# Altium PCB AgulhasCPU25.PCBDOC (part 6 of 10)
Units mm, origin at the board's own origin, x right, y up, seen from the top; angles counter-clockwise.
Board outline 179.96 x 114.94 mm, 2 copper layers (Top Layer, Top, Bottom Layer, Bottom), stack 1.341 mm thick; 247 components, 222 nets, 910 pads, 491 vias.
Unrouted connection lines stored in the file: 2.
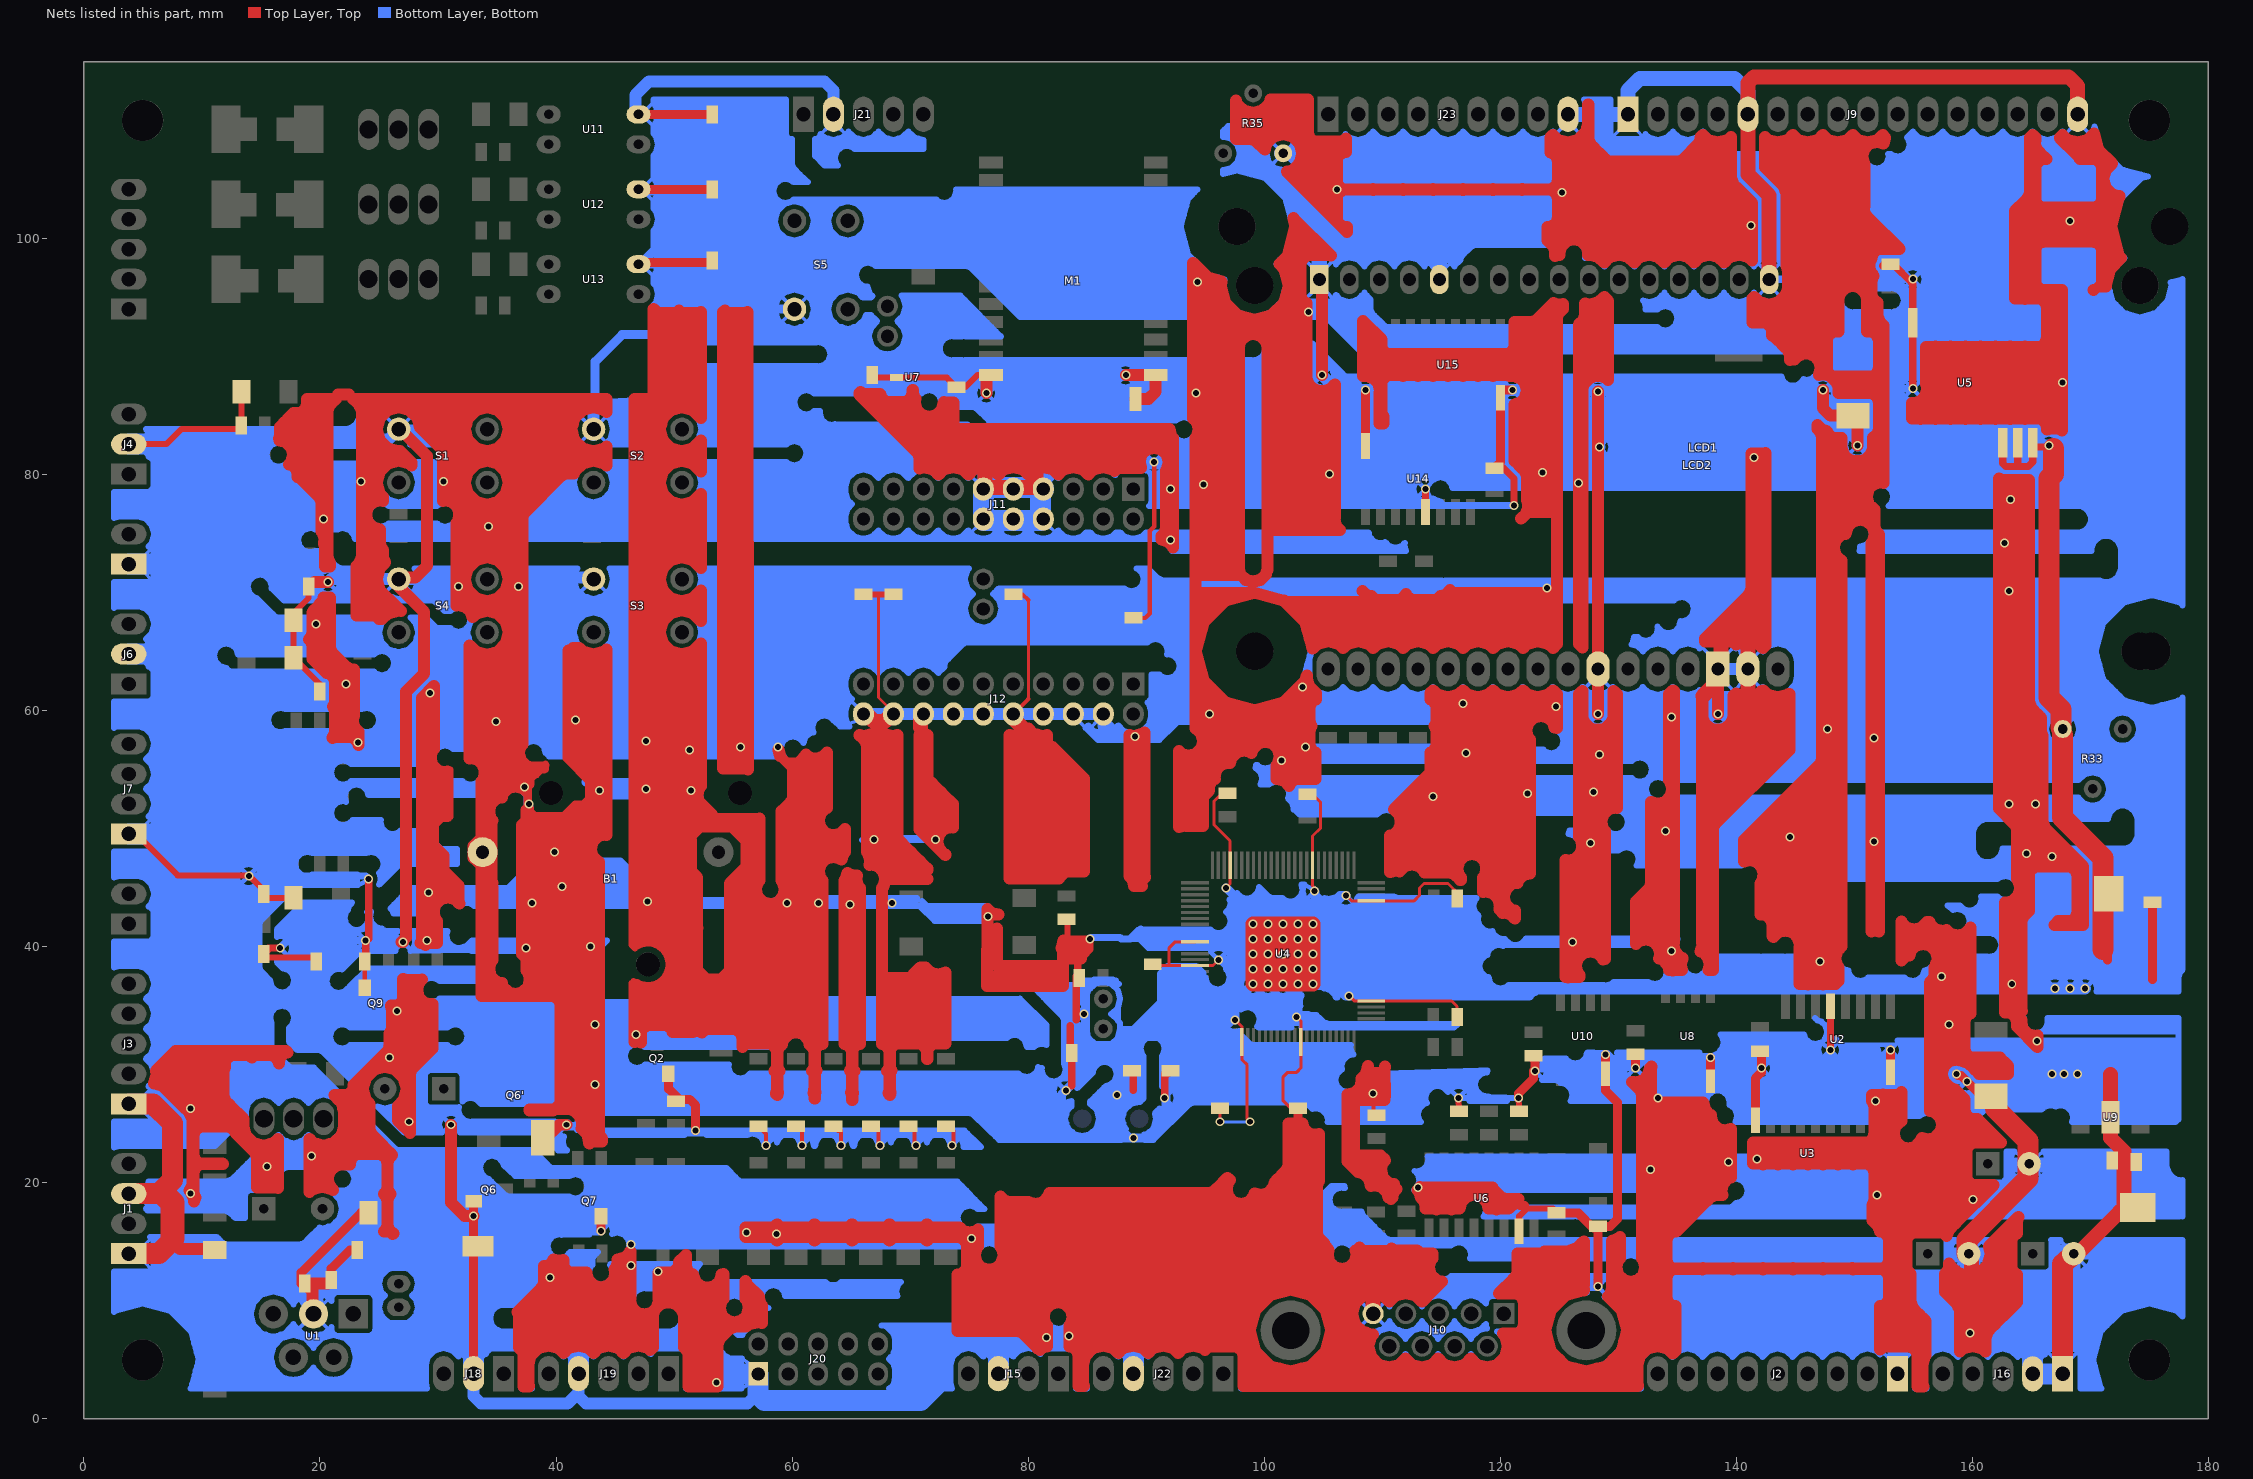
[diagram p6: the nets of this part, all layers, seen from the top]

## Via types
v1: diameter 0.762, hole 0.508, Top Layer, Top to Bottom Layer, Bottom, 489 vias
v2: diameter 0.864, hole 0.813, Top Layer, Top to Bottom Layer, Bottom, 2 vias

## Nets (pads, with @x,y where several pads share a name; then routed paths per layer and width w, separated by ;. In a path a pad name is that pad's centre, name@x,y a point inside that pad or via, vN(x,y) a via of type N, cw(c..) or ccw(c..) an arc to the next point about the centre after c; other vN are vias at no path point) (continued)
GND: (continued)
  Bottom Layer, Bottom w0.508: 2.54,9.398 3.708,9.398 ; 2.54,9.779 14.376,9.779 ; 2.54,10.16 14.707,10.16 ; 2.54,10.541 15.138,10.541 ; 2.54,10.922 25.146,10.922 ; 2.54,11.303 25.044,11.303 ; 2.54,11.684 25.07,11.684 ; 2.54,12.065 25.171,12.065 ; 2.54,12.446 25.527,12.446 ; 2.54,23.114 11.151,23.114 ; 2.54,23.495 11.532,23.495 ; 2.54,23.876 11.913,23.876 ; 2.54,24.257 12.294,24.257 ; 2.54,24.638 12.675,24.638 ; 2.54,25.019 13.056,25.019 ; 2.54,38.354 14.884,38.354 ; 2.54,38.735 14.884,38.735 ; 2.54,39.116 14.884,39.116 ; 2.54,39.497 14.884,39.497 ; 2.54,39.878 14.884,39.878 ; 2.54,40.259 14.884,40.259 ; 2.54,45.974 12.929,45.974 ; 2.54,46.355 13.03,46.355 ; 2.54,46.736 13.31,46.736 ; 2.54,47.117 17.907,47.117 ; 2.54,47.498 18.009,47.498 ; 2.54,47.879 18.39,47.879 ; 2.54,58.547 2.616,58.547 ; 2.54,58.928 15.672,58.928 ; 2.54,59.309 15.621,59.309 ; 2.54,59.69 15.723,59.69 ; 2.54,60.071 16.104,60.071 ; 2.54,60.452 64.643,60.452 ; 2.54,68.834 15.316,68.834 ; 2.54,69.215 14.935,69.215 ; 2.54,69.596 14.376,69.596 ; 2.54,69.977 13.995,69.977 ; 2.54,70.358 13.894,70.358 ; 2.54,70.739 13.945,70.739 ; 2.54,76.454 24.13,76.454 ; 2.54,76.835 24.181,76.835 ; 2.54,77.216 24.359,77.216 ; 2.54,77.597 25.095,77.597 ; 2.54,77.978 25.705,77.978 ; 2.54,78.359 25.324,78.359 ; 4.978,58.547 15.85,58.547 ; 5.385,30.353 16.84,30.353 ; 5.385,35.687 28.677,35.687 ; 5.385,37.973 14.961,37.973 ; 5.385,45.593 13.03,45.593 ; 5.385,53.213 22.2,53.213 ; 5.385,66.167 25.121,66.167 ; 5.385,68.453 15.697,68.453 ; 5.385,76.073 24.232,76.073 ; 5.385,83.693 25.044,83.693 ; 5.512,20.066 15.799,20.066 ; 5.512,30.734 16.459,30.734 ; 5.512,35.306 29.413,35.306 ; 5.512,53.594 22.581,53.594 ; 5.512,58.166 16.586,58.166 ; 5.512,65.786 25.222,65.786 ; 5.639,18.161 13.64,18.161 ; 5.639,28.067 21.158,28.067 ; 5.639,32.639 15.9,32.639 ; 5.639,33.401 15.9,33.401 ; 5.639,43.307 16.078,43.307 ; 5.639,50.927 21.031,50.927 ; 5.639,55.499 21.311,55.499 ; 5.639,56.261 29.642,56.261 ; 5.639,60.833 64.948,60.833 ; 5.639,63.881 11.405,63.881 ; 5.639,73.787 18.39,73.787 ; 5.639,81.407 15.545,81.407 ; 5.766,25.4 13.437,25.4 ; 5.766,28.448 20.777,28.448 ; 5.766,29.972 17.221,29.972 ; 5.766,36.068 21.539,36.068 ; 5.766,37.592 15.316,37.592 ; 5.766,40.64 14.884,40.64 ; 5.766,43.688 16.459,43.688 ; 5.766,45.212 13.31,45.212 ; 5.766,48.26 28.016,48.26 ; 5.766,51.308 20.93,51.308 ; 5.766,52.832 22.098,52.832 ; 5.766,63.5 12.141,63.5 ; 5.766,66.548 25.019,66.548 ; 5.766,68.072 16.078,68.072 ; 5.766,71.12 14.122,71.12 ; 5.766,74.168 18.212,74.168 ; 5.766,75.692 24.613,75.692 ; 5.766,78.74 25.146,78.74 ; 5.766,81.788 15.494,81.788 ; 5.766,83.312 25.146,83.312 ; 5.791,19.685 15.418,19.685 ; 5.791,31.115 16.078,31.115 ; 5.791,34.925 16.586,34.925 ; 5.791,53.975 21.311,53.975 ; 5.791,57.785 60.02,57.785 ; 5.791,65.405 11.405,65.405 ; 5.817,18.542 13.64,18.542 ; 5.817,32.258 15.9,32.258 ; 5.817,33.782 15.824,33.782 ; 5.817,55.118 21.031,55.118 ; 5.817,56.642 29.82,56.642 ; 5.817,64.262 11.125,64.262 ; 5.867,12.827 42.901,12.827 ; 5.867,15.113 11.532,15.113 ; 5.867,28.829 20.396,28.829 ; 5.867,29.591 19.634,29.591 ; 5.867,36.449 16.078,36.449 ; 5.867,37.211 15.697,37.211 ; 5.867,44.069 16.84,44.069 ; 5.867,44.831 17.602,44.831 ; 5.867,51.689 21.031,51.689 ; 5.867,52.451 22.149,52.451 ; 5.867,66.929 25.095,66.929 ; 5.867,67.691 25.476,67.691 ; 5.867,74.549 18.161,74.549 ; 5.867,75.311 18.644,75.311 ; 5.867,82.169 15.596,82.169 ; 5.867,82.931 25.273,82.931 ; 5.893,19.304 13.919,19.304 ; 5.893,27.686 21.539,27.686 ; 5.893,31.496 15.9,31.496 ; 5.893,34.544 15.977,34.544 ; 5.893,42.926 15.697,42.926 ; 5.893,50.546 21.311,50.546 ; 5.893,54.356 21.031,54.356 ; 5.893,57.404 38.049,57.404 ; 5.893,61.214 64.821,61.214 ; 5.893,65.024 11.125,65.024 ; 5.893,73.406 19.126,73.406 ; 5.893,81.026 15.723,81.026 ; 5.918,13.208 43.078,13.208 ; 5.918,13.589 40.259,13.589 ; 5.918,13.97 39.522,13.97 ; 5.918,14.351 39.345,14.351 ; 5.918,14.732 39.294,14.732 ; 5.918,18.923 13.64,18.923 ; 5.918,25.781 13.741,25.781 ; 5.918,26.162 13.741,26.162 ; 5.918,26.543 13.843,26.543 ; 5.918,26.924 14.122,26.924 ; 5.918,27.305 14.656,27.305 ; 5.918,31.877 15.9,31.877 ; 5.918,34.163 15.824,34.163 ; 5.918,41.021 14.884,41.021 ; 5.918,41.402 14.884,41.402 ; 5.918,41.783 14.884,41.783 ; 5.918,42.164 14.961,42.164 ; 5.918,42.545 15.316,42.545 ; 5.918,48.641 28.397,48.641 ; 5.918,49.022 28.778,49.022 ; 5.918,49.403 29.185,49.403 ; 5.918,49.784 25.502,49.784 ; 5.918,50.165 25.222,50.165 ; 5.918,54.737 20.93,54.737 ; 5.918,57.023 30.556,57.023 ; 5.918,61.595 64.618,61.595 ; 5.918,61.976 64.541,61.976 ; 5.918,62.357 64.541,62.357 ; 5.918,62.738 64.592,62.738 ; 5.918,63.119 24.74,63.119 ; 5.918,64.643 11.024,64.643 ; 5.918,71.501 14.859,71.501 ; 5.918,71.882 20.65,71.882 ; 5.918,72.263 21.336,72.263 ; 5.918,72.644 21.006,72.644 ; 5.918,73.025 20.853,73.025 ; 5.918,79.121 25.044,79.121 ; 5.918,79.502 25.044,79.502 ; 5.918,79.883 25.146,79.883 ; 5.918,80.264 25.349,80.264 ; 5.918,80.645 16.459,80.645 ; 6.223,9.398 14.275,9.398 ; 7.417,9.017 14.173,9.017 ; 7.798,8.636 14.173,8.636 ; 8.179,8.255 14.275,8.255 ; 8.56,7.874 14.402,7.874 ; 8.941,7.493 14.783,7.493 ; 9.093,2.591 9.728,4.978 9.093,7.341 7.341,9.093 4.978,9.728 2.591,9.093 2.54,9.017 2.54,12.471 5.385,12.471 5.613,12.522 5.842,12.751 5.918,12.979 5.918,14.935 5.842,15.164 5.613,15.392 11.252,15.392 11.405,15.24 11.735,14.91 12.014,14.783 12.141,14.757 18.288,14.757 18.415,14.783 18.694,14.91 19.025,15.24 19.964,16.18 20.218,16.104 21.031,16.332 21.641,16.942 21.869,17.78 ; 9.144,7.112 15.418,7.112 ; 9.169,2.921 28.981,2.921 ; 9.246,6.731 16.662,6.731 ; 9.271,3.302 17.602,3.302 ; 9.347,6.35 16.281,6.35 ; 9.373,3.683 16.612,3.683 ; 9.449,5.969 16.027,5.969 ; 9.474,4.064 16.231,4.064 ; 9.55,5.588 15.926,5.588 ; 9.576,4.445 16.027,4.445 ; 9.652,5.207 15.824,5.207 ; 9.677,4.826 15.926,4.826 ; 12.421,17.399 13.64,17.399 ; 12.7,65.405 25.578,65.405 ; 12.725,20.447 16.18,20.447 ; 12.802,17.018 13.64,17.018 ; 12.979,65.024 25.222,65.024 ; 13.106,20.828 16.561,20.828 ; 13.487,21.209 17.018,21.209 ; 13.64,17.78 5.258,17.78 ; 13.868,21.59 33.655,21.59 ; 14.249,21.971 33.884,21.971 ; 14.605,45.212 23.216,45.212 ; 14.605,46.736 17.958,46.736 ; 14.63,22.352 38.43,22.352 ; 14.884,45.593 23.114,45.593 ; 14.884,46.355 18.136,46.355 ; 14.935,71.501 19.914,71.501 ; 15.011,22.733 38.049,22.733 ; 15.392,23.114 26.111,23.114 ; 15.672,71.12 19.736,71.12 ; 15.799,23.495 17.196,23.495 ; 15.799,27.305 17.196,27.305 ; 15.85,36.83 5.969,36.83 ; 15.85,70.739 19.685,70.739 ; 15.9,33.02 5.258,33.02 ; 15.9,70.358 19.787,70.358 ; 15.977,82.55 5.969,82.55 ; 16.281,69.977 20.168,69.977 ; 16.332,23.876 16.662,23.876 ; 16.332,26.924 16.662,26.924 ; 16.358,38.735 22.555,38.735 ; 16.358,41.021 22.962,41.021 ; 16.358,41.402 23.063,41.402 ; 16.535,80.645 25.73,80.645 ; 16.662,7.112 18.821,7.112 ; 16.662,38.354 22.174,38.354 ; 16.662,41.783 22.327,41.783 ; 16.662,58.166 23.952,58.166 ; 16.662,69.596 26.162,69.596 ; 16.942,10.541 18.542,10.541 ; 17.018,34.925 40.894,34.925 52.705,34.925 79.959,34.925 ; 17.018,82.55 25.654,82.55 ; 17.043,42.164 22.149,42.164 ; 17.221,44.45 5.969,44.45 ; 17.272,39.116 22.936,39.116 ; 17.272,40.64 22.86,40.64 ; 17.297,7.493 18.186,7.493 ; 17.374,10.16 18.11,10.16 ; 17.374,32.258 20.879,32.258 ; 17.374,32.639 20.93,32.639 ; 17.374,33.02 21.107,33.02 ; 17.374,37.973 21.057,37.973 ; 17.424,31.877 20.98,31.877 ; 17.424,42.545 22.098,42.545 ; 17.526,36.449 20.803,36.449 ; 17.551,39.497 23.343,39.497 ; 17.551,40.259 22.911,40.259 ; 17.628,34.544 80.34,34.544 ; 17.653,33.401 21.844,33.401 ; 17.678,7.874 17.805,7.874 ; 17.704,9.779 17.78,9.779 ; 17.704,37.592 20.676,37.592 ; 17.755,36.83 20.625,36.83 ; 17.78,33.782 81.102,33.782 ; 17.78,34.163 80.721,34.163 ; 17.805,31.496 21.361,31.496 ; 17.805,37.211 20.574,37.211 ; 17.805,42.926 22.2,42.926 ; 17.882,3.302 21.006,3.302 ; 18.186,43.307 22.403,43.307 ; 18.263,74.93 5.969,74.93 ; 18.339,23.495 19.736,23.495 ; 18.339,27.305 19.736,27.305 ; 18.567,43.688 22.682,43.688 ; 18.821,6.731 20.066,6.731 ; 18.872,3.683 20.015,3.683 ; 18.872,23.876 19.202,23.876 ; 18.872,26.924 19.202,26.924 ; 18.872,45.974 14.986,45.974 ; 18.898,15.113 39.395,15.113 ; 18.948,45.974 23.165,45.974 ; 19.202,6.35 19.685,6.35 ; 19.202,73.406 20.853,73.406 ; 19.253,4.064 19.634,4.064 ; 19.279,15.494 39.776,15.494 ; 19.66,15.875 42.774,15.875 ; 20.015,29.21 5.969,29.21 ; 20.066,7.112 21.234,7.112 ; 20.193,31.115 45.923,31.115 ; 20.345,10.541 21.158,10.541 ; 20.549,37.084 20.701,37.592 21.057,37.948 21.59,38.1 21.869,38.024 23.114,39.268 23.317,39.472 23.546,39.573 23.343,39.624 22.987,39.98 22.835,40.513 22.987,41.021 23.343,41.377 23.876,41.529 24.384,41.377 24.74,41.021 24.892,40.513 24.74,39.98 24.384,39.624 24.282,39.599 26.416,39.599 26.162,39.853 26.01,40.386 26.162,40.894 26.518,41.25 26.619,41.3 25.629,41.3 25.349,41.402 25.248,41.504 24.74,41.656 24.384,42.012 24.232,42.545 ; 20.599,30.734 45.822,30.734 ; 20.701,7.493 20.98,7.493 ; 20.701,16.256 32.487,16.256 ; 20.701,19.304 21.844,19.304 ; 20.701,36.551 21.057,36.195 21.59,36.043 22.098,36.195 22.327,36.424 22.377,36.449 22.581,36.652 24.054,38.125 34.519,38.125 34.519,38.1 34.671,37.567 35.027,37.211 ; 20.726,71.882 25.197,71.882 ; 20.777,10.16 20.98,10.16 ; 20.879,23.495 25.73,23.495 ; 20.879,27.305 21.92,27.305 ; 20.98,30.353 45.923,30.353 ; 21.285,3.302 28.981,3.302 ; 21.311,52.07 5.969,52.07 ; 21.336,16.637 32.106,16.637 ; 21.336,18.923 35.738,18.923 ; 21.361,29.972 46.203,29.972 ; 21.412,23.876 25.349,23.876 ; 21.412,26.924 22.301,26.924 ; 21.463,71.501 25.095,71.501 ; 21.59,70.358 25.197,70.358 ; 21.615,36.068 28.499,36.068 ; 21.641,71.12 24.994,71.12 ; 21.666,17.018 32.004,17.018 ; 21.666,18.542 75.514,18.542 ; 21.692,24.257 24.968,24.257 ; 21.692,26.543 22.682,26.543 ; 21.692,70.739 25.095,70.739 ; 21.742,29.591 25.476,29.591 ; 21.768,17.399 32.055,17.399 ; 21.768,18.161 32.969,18.161 ; 21.793,24.638 24.587,24.638 ; 21.793,26.162 23.063,26.162 ; 21.819,25.019 24.206,25.019 ; 21.819,25.4 23.825,25.4 ; 21.819,25.781 23.444,25.781 ; 21.92,19.304 35.306,19.304 ; 21.92,33.401 31.445,33.401 ; 22.123,29.21 24.486,29.21 ; 22.225,6.731 52.934,6.731 ; 22.276,3.683 28.981,3.683 ; 22.352,36.449 28.448,36.449 ; 22.403,21.209 33.579,21.209 ; 22.479,75.311 64.694,75.311 ; 22.504,28.829 24.105,28.829 ; 22.606,6.35 53.315,6.35 ; 22.606,50.546 25.121,50.546 ; 22.606,53.975 32.106,53.975 ; 22.606,55.499 29.693,55.499 ; 22.657,4.064 28.981,4.064 ; 22.657,19.685 34.925,19.685 ; 22.758,36.83 28.55,36.83 ; 22.784,20.828 33.68,20.828 ; 22.835,84.074 25.07,84.074 ; 22.86,4.445 28.981,4.445 ; 22.86,5.969 30.455,5.969 ; 22.86,20.066 34.544,20.066 ; 22.86,74.93 65.075,74.93 ; 22.885,28.448 23.978,28.448 ; 22.962,4.826 29.032,4.826 ; 22.962,5.588 29.515,5.588 ; 22.962,74.549 66.015,74.549 ; 23.063,5.207 29.134,5.207 ; 23.089,39.878 17.653,39.878 ; 23.139,37.211 28.931,37.211 ; 23.139,41.402 23.343,41.402 ; 23.165,84.455 25.171,84.455 ; 23.266,28.067 23.876,28.067 ; 23.317,84.836 25.4,84.836 ; 23.52,37.592 34.646,37.592 ; 23.622,53.594 v1@37.592,53.594 ; 23.647,27.686 23.901,27.686 ; 23.876,41.783 24.613,41.783 ; 23.901,37.973 34.544,37.973 ; 24.003,53.213 36.043,53.213 ; 24.028,42.926 24.333,42.926 ; 24.028,58.166 61.798,58.166 ; 24.054,42.164 24.333,42.164 ; 24.105,42.545 24.232,42.545 ; 24.105,52.832 34.366,52.832 ; 24.384,41.402 25.375,41.402 ; 24.409,7.112 52.553,7.112 ; 24.486,10.541 25.4,10.541 ; 24.511,60.071 64.541,60.071 ; 24.638,39.878 26.137,39.878 ; 24.663,7.493 35.077,7.493 ; 24.689,7.874 34.595,7.874 ; 24.689,8.255 25.679,8.255 ; 24.689,8.636 25.298,8.636 ; 24.689,9.017 25.121,9.017 ; 24.689,9.398 25.019,9.398 ; 24.689,9.779 25.095,9.779 ; 24.689,10.16 25.248,10.16 ; 24.765,41.021 26.264,41.021 ; 24.765,58.547 61.697,58.547 ; 24.816,40.259 26.035,40.259 ; 24.867,40.64 26.086,40.64 ; 24.892,47.879 27.635,47.879 ; 24.892,59.69 64.541,59.69 ; 24.943,58.928 61.798,58.928 ; 24.994,59.309 62.078,59.309 ; 25.07,45.974 25.73,45.974 ; 25.121,45.593 25.349,45.593 ; 25.146,46.355 26.111,46.355 ; 25.171,26.162 31.725,26.162 ; 25.171,77.597 30.556,77.597 ; 25.197,67.31 5.969,67.31 ; 25.273,47.498 27.254,47.498 ; 25.298,65.024 26.34,65.024 ; 25.324,46.736 26.492,46.736 ; 25.375,47.117 26.873,47.117 ; 25.527,69.977 21.209,69.977 ; 25.552,25.781 30.582,25.781 ; 25.933,25.4 30.201,25.4 ; 26.035,64.643 73.482,64.643 ; 26.06,43.155 29.896,43.155 ; 26.162,63.5 65.075,63.5 ; 26.213,64.262 73.101,64.262 ; 26.264,63.881 66.015,63.881 ; 26.289,43.536 30.048,43.536 ; 26.314,25.019 30.099,25.019 ; 26.365,26.543 29.032,26.543 ; 26.416,81.026 59.538,81.026 ; 26.492,29.21 28.931,29.21 ; 26.67,43.917 30.709,43.917 ; 26.695,24.638 30.15,24.638 ; 26.746,26.924 28.88,26.924 ; 26.797,49.784 28.829,49.784 ; 26.822,49.809 26.67,49.657 26.162,49.505 25.629,49.657 25.273,50.013 25.121,50.546 ; 26.873,28.829 28.88,28.829 ; 26.975,27.305 28.88,27.305 ; 26.975,65.024 33.833,65.024 ; 27,28.448 28.88,28.448 ; 27.051,44.298 45.695,44.298 ; 27.076,24.257 30.328,24.257 ; 27.076,27.686 28.88,27.686 ; 27.102,28.067 28.88,28.067 ; 27.153,69.596 33.655,69.596 ; 27.432,44.679 45.11,44.679 ; 27.584,80.645 33.223,80.645 ; 27.61,77.978 33.198,77.978 ; 27.635,8.255 34.442,8.255 ; 27.661,82.55 33.147,82.55 ; 27.686,85.217 33.274,85.217 ; 27.711,41.123 30.759,41.123 ; 27.737,65.405 33.071,65.405 ; 27.788,12.446 42.799,12.446 ; 27.788,69.977 33.02,69.977 ; 27.838,67.691 29.159,67.691 ; 27.915,10.541 46.584,10.541 ; 27.915,84.836 32.893,84.836 ; 27.965,39.98 31.318,39.98 ; 27.965,40.742 30.759,40.742 ; 27.965,80.264 32.842,80.264 ; 27.991,78.359 32.817,78.359 ; 28.016,8.636 34.442,8.636 ; 28.042,82.931 32.766,82.931 ; 28.067,10.16 46.482,10.16 ; 28.067,40.361 30.861,40.361 ; 28.092,65.786 32.715,65.786 ; 28.118,67.31 29.54,67.31 ; 28.118,70.358 32.69,70.358 ; 28.118,71.882 32.69,71.882 ; 28.143,12.065 42.85,12.065 ; 28.143,84.455 32.664,84.455 ; 28.169,10.922 46.965,10.922 ; 28.169,78.74 32.639,78.74 ; 28.169,79.883 32.639,79.883 ; 28.169,83.312 32.639,83.312 ; 28.194,9.017 34.544,9.017 ; 28.194,66.167 32.614,66.167 ; 28.219,9.779 46.507,9.779 ; 28.219,66.929 31.09,66.929 ; 28.219,70.739 32.588,70.739 ; 28.219,71.501 32.588,71.501 ; 28.245,11.684 43.078,11.684 ; 28.245,84.074 32.563,84.074 ; 28.27,11.303 52.781,11.303 ; 28.27,79.121 32.537,79.121 ; 28.27,79.502 32.537,79.502 ; 28.27,83.693 32.537,83.693 ; 28.296,9.398 34.849,9.398 ; 28.296,66.548 32.512,66.548 ; 29.489,35.306 79.578,35.306 ; 29.566,49.505 29.439,49.505 29.159,49.378 28.956,49.174 25.019,45.237 25.146,45.72 25.019,46.203 25.248,46.457 25.4,46.99 25.248,47.498 24.892,47.854 24.384,48.006 23.952,47.904 19.329,47.904 18.923,48.006 18.39,47.854 18.034,47.498 17.882,46.99 18.034,46.457 18.39,46.101 18.923,45.949 19.329,46.076 23.19,46.076 23.089,45.72 23.241,45.187 18.136,45.187 17.856,45.06 17.653,44.856 15.189,42.393 14.986,42.189 14.884,41.91 14.884,41.631 14.884,38.481 14.884,38.202 14.986,37.922 15.189,37.719 15.773,37.135 15.926,36.601 16.281,36.246 16.815,36.093 17.323,36.246 17.678,36.601 17.831,37.135 17.678,37.643 17.323,37.998 16.866,38.125 16.358,38.659 16.358,38.913 16.637,38.837 17.145,38.989 17.501,39.345 17.653,39.878 ; 29.591,55.88 5.258,55.88 ; 29.718,69.215 74.803,69.215 ; 29.972,37.211 35.027,37.211 ; 30.124,68.834 74.701,68.834 ; 30.505,68.453 31.09,68.453 ; 30.632,57.023 37.313,57.023 ; 30.632,77.597 64.948,77.597 ; 30.988,43.917 57.734,43.917 ; 31.369,77.216 64.821,77.216 ; 31.42,5.588 32.055,5.588 ; 31.496,76.073 64.541,76.073 ; 31.521,33.401 81.483,33.401 ; 31.547,76.835 64.618,76.835 ; 31.598,76.454 64.541,76.454 ; 31.623,25.781 31.826,25.781 ; 31.877,24.257 40.107,24.257 ; 31.877,39.878 32.258,39.878 32.893,40.513 44.323,40.513 ; 32.004,25.4 32.106,25.4 ; 32.004,29.21 54.839,29.21 ; 32.055,24.638 39.929,24.638 ; 32.08,26.924 32.106,26.924 ; 32.08,27.305 82.271,27.305 ; 32.08,27.686 82.169,27.686 ; 32.08,28.067 82.22,28.067 ; 32.08,28.448 82.398,28.448 ; 32.08,28.829 55.575,28.829 ; 32.106,25.019 39.878,25.019 ; 32.233,17.78 21.869,17.78 ; 32.258,33.02 81.559,33.02 ; 32.258,40.005 31.75,39.853 31.217,40.005 30.861,40.361 ; 32.385,31.877 59.385,31.877 ; 32.385,66.929 32.588,66.929 ; 32.385,68.453 74.676,68.453 ; 32.436,32.639 81.559,32.639 ; 32.487,32.258 59.665,32.258 ; 32.664,67.31 32.69,67.31 ; 32.664,68.072 33.477,68.072 ; 32.842,39.599 43.409,39.599 44.323,40.513 ; 32.969,67.691 32.766,67.691 ; 32.995,5.969 30.48,5.969 ; 33.045,18.161 75.895,18.161 ; 33.401,26.924 82.652,26.924 ; 33.401,53.975 35.204,53.975 37.313,53.975 37.541,53.746 37.541,52.883 37.44,52.781 37.389,53.975 ; 33.68,54.356 35.89,54.356 ; 33.68,55.118 35.128,55.118 ; 33.782,17.78 74.397,17.78 ; 33.909,16.637 43.155,16.637 ; 33.96,5.588 34.112,5.588 ; 33.96,17.399 74.117,17.399 ; 33.985,20.447 22.885,20.447 ; 34.011,17.018 74.016,17.018 ; 34.468,65.024 42.951,65.024 ; 34.544,85.598 60.3,85.598 ; 34.646,69.596 42.672,69.596 ; 34.823,68.072 42.393,68.072 ; 35.027,85.217 42.291,85.217 ; 35.077,80.645 42.24,80.645 ; 35.103,77.978 42.215,77.978 ; 35.154,82.55 42.164,82.55 ; 35.23,65.405 42.113,65.405 ; 35.281,21.971 38.811,21.971 ; 35.281,69.977 42.037,69.977 ; 35.331,67.691 41.961,67.691 ; 35.408,84.836 41.91,84.836 ; 35.458,80.264 41.859,80.264 ; 35.484,78.359 41.834,78.359 ; 35.509,21.59 39.192,21.59 ; 35.509,54.737 33.782,54.737 ; 35.535,82.931 41.783,82.931 ; 35.585,65.786 41.732,65.786 ; 35.611,67.31 41.707,67.31 ; 35.611,70.358 41.707,70.358 ; 35.611,71.882 41.707,71.882 ; 35.636,84.455 41.681,84.455 ; 35.662,78.74 41.656,78.74 ; 35.662,79.883 41.656,79.883 ; 35.662,83.312 41.656,83.312 ; 35.687,56.642 37.135,56.642 ; 35.687,66.167 41.631,66.167 ; 35.712,66.929 41.58,66.929 ; 35.712,70.739 41.605,70.739 ; 35.712,71.501 41.605,71.501 ; 35.738,84.074 41.58,84.074 ; 35.763,79.121 41.554,79.121 ; 35.763,79.502 41.554,79.502 ; 35.763,83.693 41.554,83.693 ; 35.789,66.548 41.529,66.548 ; 35.865,21.209 54.432,21.209 ; 36.093,56.261 37.084,56.261 ; 36.246,20.828 54.813,20.828 ; 36.474,55.88 37.186,55.88 ; 36.855,55.499 37.567,55.499 ; 36.982,5.588 38.405,5.588 ; 37.059,2.921 37.871,2.921 ; 37.059,3.302 37.871,3.302 ; 37.059,3.683 37.871,3.683 ; 37.059,4.064 37.871,4.064 ; 37.059,4.445 37.871,4.445 ; 37.059,4.826 37.922,4.826 ; 37.059,5.207 38.024,5.207 ; 37.44,52.832 37.084,53.188 36.576,53.34 36.043,53.188 35.89,53.061 34.773,53.061 34.493,52.934 34.341,52.807 24.105,52.807 23.978,53.213 23.622,53.569 23.114,53.721 22.581,53.569 22.225,53.213 22.073,52.705 22.2,52.248 21.971,52.324 21.438,52.172 21.082,51.816 20.93,51.308 ; 37.719,54 36.424,54 36.144,54.102 35.941,54.305 34.976,55.27 33.63,55.27 33.63,55.245 33.782,54.737 ; 38.125,57.404 59.284,57.404 ; 38.862,57.023 v1@59.106,57.023 ; 39.014,23.876 40.64,23.876 ; 39.04,56.642 v1@59.055,56.642 ; 39.116,48.133 43.205,48.108 ; 39.167,47.422 39.243,47.498 ; 39.218,47.473 39.243,47.498 ; 39.243,47.752 43.18,47.752 43.155,48.26 43.205,48.412 39.37,48.387 ; 39.268,56.261 59.157,56.261 ; 39.345,5.969 33.02,5.969 ; 39.395,23.495 40.538,23.495 ; 39.497,47.752 39.37,47.752 ; 39.497,47.777 39.37,47.752 ; v1@39.751,47.727 39.751,47.752 39.37,47.752 ; 39.776,23.114 40.64,23.114 ; 40.157,22.733 40.919,22.733 ; 40.31,5.588 40.945,5.588 ; 40.335,13.589 43.104,13.589 ; 41.072,13.97 43.383,13.97 ; 41.402,85.979 60.198,85.979 ; 41.885,5.969 39.37,5.969 ; 41.885,24.79 42.596,24.79 ; 41.986,24.409 43.155,24.409 ; 42.291,18.923 75.133,18.923 ; 42.291,20.447 55.194,20.447 ; 42.57,19.304 74.752,19.304 ; 42.57,20.066 73.99,20.066 ; 42.697,52.832 52.172,52.832 ; 42.85,5.588 43.485,5.588 ; 42.85,54 42.799,53.721 43.18,53.34 52.07,53.34 51.943,53.213 43.18,53.213 43.561,53.594 43.053,53.594 42.799,53.34 42.799,52.832 42.748,52.781 42.748,52.73 42.748,53.543 42.393,53.899 42.393,53.95 42.443,54 44.399,54 ; 42.875,16.256 33.528,16.256 ; 42.926,26.543 83.668,26.543 ; 43.332,26.162 83.363,26.162 ; 43.383,65.024 50.444,65.024 ; 43.536,53.594 52.553,53.594 ; 43.561,40.132 32.893,40.132 32.639,39.878 32.639,39.751 43.434,39.751 44.196,40.513 44.323,40.513 ; 43.637,52.68 52.222,52.68 52.172,52.832 ; 43.663,69.596 50.165,69.596 ; 43.942,68.072 49.886,68.072 ; 44.044,85.217 49.784,85.217 ; 44.094,80.645 49.733,80.645 ; 44.12,77.978 49.708,77.978 ; 44.171,82.55 49.657,82.55 ; 44.221,65.405 49.606,65.405 ; 44.298,69.977 49.53,69.977 ; 44.374,67.691 49.454,67.691 ; 44.425,5.969 41.91,5.969 ; 44.425,45.06 42.799,45.466 42.291,45.974 39.116,45.974 39.116,46.482 41.783,46.482 42.418,45.847 42.418,45.593 38.481,45.593 39.751,46.863 41.783,46.863 43.307,45.339 43.561,45.339 37.719,45.339 39.624,47.244 41.783,47.244 43.942,45.085 44.577,45.085 36.957,45.085 39.37,47.498 42.164,47.498 44.704,44.958 36.322,44.958 39.37,48.006 39.37,48.387 ; 44.425,84.836 49.403,84.836 ; 44.45,16.637 74.117,16.637 ; 44.475,80.264 49.352,80.264 ; 44.501,78.359 49.327,78.359 ; 44.526,11.684 52.045,11.684 ; 44.552,82.931 49.276,82.931 ; 44.628,67.31 49.2,67.31 ; 44.628,70.358 49.2,70.358 ; 44.628,71.882 49.2,71.882 ; 44.653,84.455 49.174,84.455 ; 44.679,78.74 49.149,78.74 ; 44.679,79.883 49.149,79.883 ; 44.679,83.312 49.149,83.312 ; 44.704,12.827 51.918,12.827 ; 44.704,66.167 49.124,66.167 ; 44.729,16.256 74.397,16.256 ; 44.729,70.739 49.098,70.739 ; 44.729,71.501 49.098,71.501 ; 44.755,12.065 51.867,12.065 ; 44.755,66.929 49.073,66.929 ; 44.755,84.074 49.073,84.074 ; 44.78,79.121 49.047,79.121 ; 44.78,79.502 49.047,79.502 ; 44.78,83.693 49.047,83.693 ; 44.806,12.446 51.816,12.446 ; 44.806,66.548 49.022,66.548 ; 45.39,5.588 46.025,5.588 ; 45.847,15.494 110.084,15.494 ; 46.126,15.113 126.314,15.113 ; 46.203,31.496 32.004,31.496 ; 46.965,5.969 44.45,5.969 ; 47.498,29.972 54.61,29.972 ; 47.498,31.496 59.284,31.496 ; 47.93,5.588 48.082,5.588 ; 48.26,86.741 60.427,86.741 ; 48.26,87.122 61.163,87.122 ; 48.26,87.503 75.667,87.503 ; 48.26,87.884 76.403,87.884 ; 48.26,88.265 87.249,88.265 ; 48.26,88.646 87.3,88.646 ; 48.26,89.027 87.478,89.027 ; 48.26,91.313 66.599,91.313 ; 48.26,91.694 66.497,91.694 ; 48.26,92.075 66.599,92.075 ; 48.26,92.456 59.69,92.456 ; 48.26,92.837 59.055,92.837 ; 48.26,93.218 58.725,93.218 ; 48.26,93.599 58.623,93.599 ; 48.26,93.98 58.522,93.98 ; 48.26,96.266 65.634,96.266 ; 48.26,96.647 65.456,96.647 ; 48.26,98.933 93.472,98.933 ; 48.26,99.314 93.37,99.314 ; 48.26,99.695 93.269,99.695 ; 48.26,100.076 59.309,100.076 ; 48.26,100.457 58.928,100.457 ; 48.26,102.743 59.182,102.743 ; 48.26,103.124 58.903,103.124 ; 48.26,105.41 60.681,105.41 ; 48.26,105.791 60.3,105.791 ; 48.26,106.172 60.02,106.172 ; 48.26,106.553 59.969,106.553 ; 48.26,106.934 59.969,106.934 ; 48.26,109.22 59.461,109.22 ; 48.26,111.506 59.461,111.506 ; 48.285,94.361 58.623,94.361 ; 48.285,105.029 59.385,105.029 ; 48.285,108.839 59.461,108.839 ; 48.285,109.601 59.461,109.601 ; 48.412,97.028 65.405,97.028 ; 48.412,98.552 93.624,98.552 ; 48.412,100.838 58.699,100.838 ; 48.412,102.362 58.801,102.362 ; 48.489,95.885 66.37,95.885 ; 48.489,103.505 58.522,103.505 ; 48.489,107.315 59.969,107.315 ; 48.489,111.125 59.461,111.125 ; 48.514,94.742 58.725,94.742 ; 48.514,104.648 58.649,104.648 ; 48.514,108.458 59.741,108.458 ; 48.514,109.982 59.461,109.982 ; 48.539,97.409 65.507,97.409 ; 48.539,98.171 94.005,98.171 ; 48.539,101.219 58.598,101.219 ; 48.539,101.981 58.674,101.981 ; 48.59,95.504 59.69,95.504 ; 48.59,103.886 58.42,103.886 ; 48.59,107.696 59.969,107.696 ; 48.59,110.744 59.461,110.744 ; 48.616,95.123 59.055,95.123 ; 48.616,104.267 58.471,104.267 ; 48.616,108.077 59.969,108.077 ; 48.616,110.363 59.461,110.363 ; 49.987,7.493 52.172,7.493 ; 50.521,9.017 50.648,9.017 ; 50.622,8.255 51.41,8.255 ; 50.648,8.636 51.029,8.636 ; 50.876,65.024 73.863,65.024 ; 50.952,5.588 54.077,5.588 ; 51.029,2.921 55.677,2.921 ; 51.029,3.302 55.677,3.302 ; 51.029,3.683 55.677,3.683 ; 51.029,4.064 55.677,4.064 ; 51.029,4.445 55.677,4.445 ; 51.029,4.826 55.677,4.826 ; 51.029,5.207 54.534,5.207 ; 51.156,69.596 75.082,69.596 ; 51.435,68.072 74.778,68.072 ; 51.486,10.922 57.633,10.922 ; 51.537,85.217 60.681,85.217 ; 51.587,80.645 89.738,80.645 ; 51.613,77.978 64.643,77.978 ; 51.664,82.55 59.538,82.55 ; 51.714,65.405 74.244,65.405 ; 51.791,7.874 50.47,7.874 ; 51.791,69.977 75.209,69.977 ; 51.867,67.691 74.955,67.691 ; 51.918,84.836 62.433,84.836 ; 51.943,10.541 57.455,10.541 ; 51.968,80.264 65.557,80.264 ; 51.994,78.359 64.541,78.359 ; 52.045,82.931 92.685,82.931 ; 52.121,67.31 75.336,67.31 ; 52.121,70.358 74.828,70.358 ; 52.121,71.882 74.828,71.882 ; 52.146,84.455 62.713,84.455 ; 52.172,78.74 64.541,78.74 ; 52.172,79.883 64.948,79.883 ; 52.172,83.312 75.768,83.312 ; 52.197,66.167 94.717,66.167 ; 52.222,70.739 74.727,70.739 ; 52.222,71.501 74.727,71.501 ; 52.248,66.929 94.92,66.929 ; 52.248,84.074 75.006,84.074 ; 52.273,79.121 64.541,79.121 ; 52.273,79.502 64.643,79.502 ; 52.273,83.693 75.387,83.693 ; 52.299,66.548 94.818,66.548 ; 52.324,10.16 54.458,10.16 ; 52.324,53.34 52.172,52.832 ; 52.705,9.779 54.178,9.779 ; 52.756,24.155 74.854,24.155 ; 52.857,11.303 58.369,11.303 ; 53.086,9.398 54.077,9.398 ; 53.467,9.017 54.178,9.017 ; 53.696,5.969 46.99,5.969 ; 53.848,8.636 54.458,8.636 ; 54.229,8.255 55.194,8.255 ; 54.61,7.874 56.744,7.874 ; 54.661,29.591 25.502,29.591 ; 54.991,7.493 56.083,7.493 ; 55.372,7.112 55.778,7.112 ; 55.651,28.829 81.509,28.829 ; 55.753,10.16 57.404,10.16 ; 56.032,9.779 57.506,9.779 ; 56.159,9.398 57.887,9.398 ; 56.388,29.21 79.223,29.21 ; 57.633,43.942 58.166,43.79 58.674,43.942 58.826,44.094 70.587,44.094 ; 58.445,11.303 63.449,11.303 ; 58.522,23.774 58.928,23.774 ; 58.572,43.917 70.612,43.917 ; 58.572,101.6 48.641,101.6 ; 59.182,10.922 68.834,10.922 ; 59.36,10.541 68.885,10.541 ; 59.461,105.029 61.062,105.029 ; 60.096,57.785 61.189,57.785 ; 60.173,103.124 59.944,103.124 ; 60.249,86.36 48.26,86.36 ; 60.681,92.456 64.211,92.456 ; 60.681,95.504 64.211,95.504 ; 60.833,57.404 61.011,57.404 ; 60.833,81.026 89.637,81.026 ; 60.833,82.55 127.432,82.55 ; 60.96,32.258 78.207,32.258 ; 61.062,100.076 63.83,100.076 ; 61.112,81.407 89.738,81.407 ; 61.112,82.169 127.381,82.169 ; 61.189,102.743 63.703,102.743 ; 61.239,87.122 71.577,87.122 ; 61.316,92.837 63.576,92.837 ; 61.316,95.123 63.576,95.123 ; 61.443,100.457 63.449,100.457 ; 61.57,23.774 62.23,23.774 ; 61.57,102.362 63.322,102.362 ; 61.646,93.218 63.246,93.218 ; 61.646,94.742 63.246,94.742 ; 61.671,100.838 63.221,100.838 ; 61.697,101.981 63.195,101.981 ; 61.747,93.599 63.144,93.599 ; 61.747,94.361 63.144,94.361 ; 61.773,23.393 62.027,23.393 ; 61.773,101.219 63.119,101.219 ; 61.798,101.6 63.094,101.6 ; 61.951,107.29 63.729,107.29 ; 61.951,107.671 64.084,107.671 ; 61.951,108.052 71.12,108.052 ; 62.001,106.909 63.627,106.909 ; 62.103,108.433 63.094,108.433 ; 62.382,106.528 63.678,106.528 ; 62.408,108.814 62.433,108.814 ; 62.865,89.408 88.214,89.408 ; 62.865,90.932 66.7,90.932 ; 63.144,89.789 73,89.789 ; 63.144,90.551 67.081,90.551 ; 63.373,59.309 64.541,59.309 ; 63.525,11.303 68.936,11.303 ; 63.779,58.928 64.643,58.928 ; 63.881,108.433 65.634,108.433 ; 64.541,108.814 64.973,108.814 ; 64.592,75.692 31.115,75.692 ; 64.694,63.119 25.781,63.119 ; 64.694,103.124 60.198,103.124 ; 64.872,23.774 65.532,23.774 ; 65.075,23.393 65.329,23.393 ; 65.176,107.671 71.12,107.671 ; 65.202,92.456 66.7,92.456 ; 65.202,95.504 66.497,95.504 ; 65.583,100.076 93.167,100.076 ; 65.71,102.743 93.396,102.743 ; 65.837,92.837 67.081,92.837 ; 65.837,95.123 66.777,95.123 ; 65.888,97.79 48.641,97.79 ; 65.964,100.457 93.066,100.457 ; 66.04,74.549 68.555,74.549 ; 66.091,102.362 93.294,102.362 ; 66.167,93.218 66.954,93.218 ; 66.192,100.838 92.964,100.838 ; 66.218,101.981 93.193,101.981 ; 66.294,101.219 92.989,101.219 ; 66.319,101.6 93.091,101.6 ; 66.421,108.433 68.174,108.433 ; 66.497,80.264 68.097,80.264 ; 66.929,97.79 94.386,97.79 ; 66.98,63.5 67.615,63.5 ; 66.98,74.93 67.615,74.93 ; 67.081,108.814 67.513,108.814 ; 67.107,79.883 67.488,79.883 ; 67.64,7.874 81.89,7.874 ; 67.945,90.17 63.246,90.17 ; 68.174,23.774 68.58,23.774 ; 68.174,90.17 72.619,90.17 ; 68.301,7.493 90.5,7.493 ; 68.351,5.207 73.584,5.207 ; 68.428,4.826 73.482,4.826 ; 68.555,63.881 66.04,63.881 ; 68.58,2.921 73.431,2.921 ; 68.58,74.549 71.095,74.549 ; 68.605,5.588 73.965,5.588 ; 68.605,7.112 90.703,7.112 ; 68.631,4.445 73.431,4.445 ; 68.682,3.302 73.431,3.302 ; 68.707,5.969 74.905,5.969 ; 68.707,6.731 90.703,6.731 ; 68.732,3.683 73.431,3.683 ; 68.732,4.064 73.431,4.064 ; 68.732,6.35 90.703,6.35 ; 68.961,108.433 70.714,108.433 ; 69.037,80.264 70.637,80.264 ; 69.037,90.551 72.517,90.551 ; 69.037,92.837 76.53,92.837 ; 69.164,93.218 76.149,93.218 ; 69.291,95.123 74.244,95.123 ; 69.418,90.932 72.542,90.932 ; 69.418,92.456 76.911,92.456 ; 69.444,93.599 75.768,93.599 ; 69.469,94.742 74.625,94.742 ; 69.52,63.5 70.155,63.5 ; 69.52,74.93 70.155,74.93 ; 69.52,91.313 72.746,91.313 ; 69.52,92.075 77.292,92.075 ; 69.545,93.98 75.387,93.98 ; 69.571,94.361 75.006,94.361 ; 69.621,108.814 70.053,108.814 ; 69.647,79.883 70.028,79.883 ; 71.095,63.881 68.58,63.881 ; 71.12,74.549 73.635,74.549 ; 71.222,23.774 71.628,23.774 ; 71.577,80.264 73.177,80.264 ; 71.653,87.122 75.489,87.122 ; 71.73,43.129 71.018,43.84 70.993,43.84 72.39,42.443 76.581,42.443 76.302,42.164 72.06,42.164 70.815,43.409 33.071,43.409 32.918,43.536 32.639,43.663 31.521,43.663 31.369,43.79 30.861,43.942 30.328,43.79 29.972,43.434 29.82,42.926 29.87,42.774 ; 72.06,63.5 72.695,63.5 ; 72.06,74.93 72.695,74.93 ; 72.187,79.883 72.568,79.883 ; 72.39,86.741 75.438,86.741 ; 72.568,86.36 75.54,86.36 ; 72.619,85.979 75.921,85.979 ; 73.304,43.409 73.939,43.409 74.549,42.799 76.581,42.799 72.339,43.256 76.581,43.256 76.581,42.824 72.212,42.824 71.628,43.409 71.425,43.409 76.581,43.409 ; 73.482,91.694 69.621,91.694 ; 73.533,43.307 74.295,42.545 v1(76.581,42.545) ; 73.558,91.694 74.498,91.694 ; 73.66,74.549 76.175,74.549 ; 73.787,103.505 93.701,103.505 ; 73.889,103.886 94.082,103.886 ; 74.117,80.264 75.717,80.264 ; 74.27,23.774 75.235,23.774 ; 74.371,19.685 42.672,19.685 ; 74.422,43.18 76.454,43.18 ; 74.473,23.393 75.616,23.393 ; 74.574,91.694 77.673,91.694 ; 74.6,74.93 75.235,74.93 ; 74.727,79.883 75.108,79.883 ; 75.209,97.409 94.767,97.409 ; 75.311,25.781 83.236,25.781 ; 75.565,85.598 177.8,85.598 ; 75.59,97.028 95.148,97.028 ; 75.692,16.256 109.322,16.256 ; 75.692,17.78 76.276,17.78 ; 75.717,25.4 83.134,25.4 ; 75.87,5.588 76.505,5.588 ; 75.971,85.217 177.8,85.217 ; 75.971,96.647 96.114,96.647 ; 76.098,25.019 83.236,25.019 ; 76.175,14.732 v1@46.228,14.732 ; 76.2,74.549 78.715,74.549 ; 76.352,84.836 93.167,84.836 ; 76.352,96.266 96.571,96.266 ; 76.479,24.638 83.363,24.638 ; 76.479,87.884 87.351,87.884 ; 76.657,80.264 78.257,80.264 ; 76.733,95.885 96.52,95.885 ; 76.86,24.257 83.744,24.257 ; 77.038,67.31 95.021,67.31 ; 77.114,95.504 96.622,95.504 ; 77.14,74.93 77.775,74.93 ; 77.165,69.977 177.8,69.977 ; 77.216,14.732 105.994,14.732 ; 77.216,87.503 87.732,87.503 ; 77.241,23.876 87.884,23.876 ; 77.267,79.883 77.648,79.883 ; 77.292,69.596 98.577,69.596 ; 77.343,86.36 107.925,86.36 ; 77.394,87.122 107.544,87.122 ; 77.419,67.691 95.377,67.691 ; 77.445,5.969 74.93,5.969 ; 77.445,86.741 107.645,86.741 ; 77.47,13.208 105.893,13.208 ; 77.495,95.123 96.723,95.123 ; 77.572,69.215 97.155,69.215 ; 77.597,14.351 105.689,14.351 ; 77.597,68.072 95.758,68.072 ; 77.648,13.589 105.664,13.589 ; 77.673,68.834 96.52,68.834 ; 77.699,13.97 105.588,13.97 ; 77.699,68.453 96.139,68.453 ; 77.876,94.742 96.825,94.742 ; 78.257,94.361 97.13,94.361 ; 78.41,5.588 79.045,5.588 ; 78.638,93.98 97.511,93.98 ; 78.74,74.549 81.255,74.549 ; 79.019,93.599 98.069,93.599 ; 79.197,80.264 80.797,80.264 ; 79.502,32.258 81.559,32.258 ; 79.68,74.93 80.315,74.93 ; 79.781,31.877 81.559,31.877 ; 79.807,79.883 80.188,79.883 ; 79.985,5.969 77.47,5.969 ; 80.493,31.496 79.883,31.496 ; 80.518,29.21 81.229,29.21 ; 80.543,36.449 85.268,36.449 ; 80.797,29.591 81.128,29.591 ; 80.924,36.068 85.039,36.068 ; 80.95,5.588 81.102,5.588 ; 81.28,74.549 83.795,74.549 ; 81.305,35.687 84.938,35.687 ; 81.686,35.306 84.658,35.306 ; 81.737,80.264 83.337,80.264 ; 82.067,34.925 83.922,34.925 ; 82.22,74.93 82.855,74.93 ; 82.347,79.883 82.728,79.883 ; 82.448,34.544 83.744,34.544 ; 82.804,28.829 83.134,28.829 ; 82.829,34.163 83.693,34.163 ; 83.033,30.353 89.764,30.353 ; 83.033,30.734 89.764,30.734 ; 83.033,31.115 89.586,31.115 ; 83.033,31.496 89.535,31.496 ; 83.033,31.877 85.522,31.877 ; 83.033,32.258 85.141,32.258 ; 83.033,32.639 85.014,32.639 ; 83.033,33.02 84.912,33.02 ; 83.033,33.401 84.176,33.401 ; 83.083,29.21 85.369,29.21 ; 83.083,29.972 85.827,29.972 ; 83.185,7.874 90.119,7.874 ; 83.21,28.829 84.988,28.829 ; 83.464,8.255 89.738,8.255 ; 83.795,33.782 83.033,33.782 ; 83.82,74.549 86.335,74.549 ; 83.947,28.448 84.607,28.448 ; 83.972,5.588 85.395,5.588 ; 84.049,2.921 84.861,2.921 ; 84.049,3.302 84.861,3.302 ; 84.049,3.683 84.861,3.683 ; 84.049,4.064 84.861,4.064 ; 84.049,4.445 84.861,4.445 ; 84.049,4.826 84.912,4.826 ; 84.049,5.207 85.014,5.207 ; 84.125,28.067 84.226,28.067 ; 84.277,80.264 85.877,80.264 ; 84.328,36.83 85.7,36.83 ; 84.734,35.306 84.963,35.306 ; 84.76,74.93 85.395,74.93 ; 84.887,58.547 85.268,58.547 ; 84.887,79.883 85.268,79.883 ; 85.242,58.166 85.877,58.166 ; 85.293,26.924 89.56,26.924 ; 85.395,24.257 87.986,24.257 ; 85.395,26.543 88.57,26.543 ; 85.547,29.591 83.185,29.591 ; 85.623,57.785 91.389,57.785 ; 85.674,27.305 89.764,27.305 ; 85.776,24.638 88.189,24.638 ; 85.776,26.162 88.189,26.162 ; 85.903,25.019 88.062,25.019 ; 85.903,25.781 88.062,25.781 ; 86.055,27.686 89.764,27.686 ; 86.335,5.969 80.01,5.969 ; 86.36,74.549 88.875,74.549 ; 86.436,28.067 89.764,28.067 ; 86.817,58.166 88.417,58.166 ; 86.817,80.264 87.63,80.264 ; 86.995,36.83 87.706,36.83 ; 87.122,28.448 89.764,28.448 ; 87.122,29.972 89.764,29.972 ; 87.173,31.877 89.637,31.877 ; 87.3,5.588 87.935,5.588 ; 87.3,74.93 87.935,74.93 ; 87.401,28.829 89.764,28.829 ; 87.401,29.591 89.764,29.591 ; 87.427,37.109 84.633,37.109 84.353,36.83 84.074,36.728 80.264,36.728 82.702,34.265 82.906,34.061 83.033,33.782 ; 87.427,58.547 87.808,58.547 ; 87.554,32.258 90.018,32.258 ; 87.681,32.639 97.917,32.639 ; 88.29,89.408 104.851,89.408 ; 88.646,40.64 89.408,40.64 89.916,40.132 89.662,40.386 90.17,39.878 93.726,39.878 96.088,39.878 ; 88.875,5.969 86.36,5.969 ; 88.9,74.549 109.068,74.549 ; 89.027,89.027 104.115,89.027 ; 89.154,87.884 103.988,87.884 ; 89.205,88.646 103.937,88.646 ; 89.256,88.265 103.886,88.265 ; 89.357,8.636 83.566,8.636 ; 89.357,58.166 91.77,58.166 ; 89.408,70.358 177.8,70.358 ; 89.408,71.882 90.297,71.882 ; 89.51,41.529 89.535,41.504 89.637,41.453 89.764,41.427 89.789,41.427 89.789,41.402 89.916,41.427 95.453,41.427 95.606,41.275 96.139,41.123 96.647,41.275 97.003,41.631 97.155,42.164 ; 89.687,70.739 177.8,70.739 ; 89.687,71.501 90.678,71.501 ; 89.764,29.21 87.503,29.21 ; 89.789,40.259 98.12,40.259 ; 89.84,5.588 90.475,5.588 ; 89.84,74.93 108.864,74.93 ; 89.891,23.876 90.881,23.876 ; 89.916,40.386 89.967,40.538 ; 89.916,41.021 98.12,41.021 ; 89.967,58.547 92.151,58.547 ; 90.018,81.788 61.214,81.788 ; 90.043,40.64 98.019,40.64 ; 90.043,41.402 95.479,41.402 ; 90.145,65.786 52.095,65.786 ; 90.221,24.257 91.262,24.257 ; 90.272,58.928 92.558,58.928 ; 90.272,60.452 98.374,60.452 ; 90.272,60.833 96.952,60.833 ; 90.373,59.309 123.393,59.309 ; 90.373,60.071 127.33,60.071 ; 90.399,59.69 127.229,59.69 ; 90.424,77.597 115.011,77.597 ; 90.424,79.883 177.8,79.883 ; 90.449,61.214 96.469,61.214 ; 90.449,61.595 96.088,61.595 ; 90.449,61.976 95.707,61.976 ; 90.449,62.357 95.326,62.357 ; 90.449,62.738 91.77,62.738 ; 90.449,77.978 113.005,77.978 ; 90.449,78.359 112.725,78.359 ; 90.449,78.74 112.624,78.74 ; 90.449,79.121 112.725,79.121 ; 90.449,79.502 113.005,79.502 ; 90.602,24.638 91.643,24.638 ; 90.678,39.903 90.678,39.878 89.662,40.64 ; 90.703,5.969 88.9,5.969 ; 90.729,25.019 92.024,25.019 ; 90.729,25.781 92.786,25.781 ; 90.805,33.401 96.596,33.401 ; 90.932,33.782 96.495,33.782 ; 91.008,26.162 91.516,26.162 ; 91.059,32.258 98.247,32.258 ; 91.059,34.163 96.596,34.163 ; 91.186,71.12 89.789,71.12 ; 91.313,80.264 177.8,80.264 ; 91.313,81.788 127.483,81.788 ; 91.338,28.448 106.096,28.448 ; 91.338,28.829 106.045,28.829 ; 91.338,29.21 106.147,29.21 ; 91.338,29.591 106.528,29.591 ; 91.338,29.972 106.553,29.972 ; 91.338,30.353 106.655,30.353 ; 91.44,31.877 98.628,31.877 ; 91.44,65.786 94.615,65.786 ; 91.491,31.115 107.391,31.115 ; 91.542,31.496 107.29,31.496 ; 91.592,26.162 93.167,26.162 ; 91.592,80.645 177.8,80.645 ; 91.592,81.407 127.864,81.407 ; 91.694,74.168 109.804,74.168 ; 91.719,65.405 94.513,65.405 ; 91.796,37.363 95.021,37.363 95.174,36.855 95.529,36.5 96.063,36.347 96.571,36.5 96.926,36.855 97.079,37.389 96.926,37.897 96.749,38.075 97.003,38.329 97.155,38.862 97.003,39.37 96.647,39.726 96.139,39.878 95.606,39.726 ; 91.821,34.544 96.876,34.544 ; 91.846,62.738 95.021,62.738 ; 92.075,28.067 106.274,28.067 ; 92.075,37.211 92.583,37.059 92.939,36.703 93.091,36.195 92.939,35.662 92.583,35.306 103.022,35.306 ; 92.075,73.787 111.074,73.787 ; 92.1,37.211 95.072,37.211 ; 92.329,26.543 93.548,26.543 ; 92.329,64.643 94.513,64.643 ; 92.405,25.4 90.83,25.4 ; 92.456,27.686 107.01,27.686 ; 92.507,26.924 113.716,26.924 ; 92.558,27.305 113.665,27.305 ; 92.583,34.925 102.21,34.925 ; 92.583,63.119 94.92,63.119 ; 92.71,64.262 94.615,64.262 ; 92.761,63.5 94.818,63.5 ; 92.812,63.881 94.717,63.881 ; 92.837,36.83 95.199,36.83 ; 92.964,35.687 103.073,35.687 ; 93.015,36.449 95.733,36.449 ; 93.066,36.068 98.4,36.068 ; 93.243,84.836 177.8,84.836 ; 93.497,103.124 73.406,103.124 ; 93.98,84.455 177.8,84.455 ; 94.107,83.312 128.346,83.312 ; 94.158,84.074 177.8,84.074 ; 94.209,83.693 177.8,83.693 ; 94.412,65.024 91.821,65.024 ; 94.767,12.827 114.148,12.827 ; 95.148,12.446 114.249,12.446 ; 95.529,12.065 114.529,12.065 ; 95.91,11.684 127.356,11.684 ; 96.164,39.878 98.146,39.878 ; 96.291,11.303 127.254,11.303 ; 96.368,36.449 98.12,36.449 ; 96.52,108.839 103.911,108.839 ; 96.596,105.791 101.498,105.791 ; 96.647,109.22 103.911,109.22 ; 96.672,10.922 127.305,10.922 ; 96.774,41.402 98.146,41.402 ; 96.876,33.02 92.583,35.433 92.583,36.449 92.329,36.703 92.329,36.83 92.329,34.798 90.805,33.274 90.297,33.274 91.948,34.925 91.948,37.084 92.202,37.338 92.202,37.719 94.488,37.719 94.234,37.973 92.075,37.973 91.567,37.465 91.567,35.052 89.535,33.02 89.027,33.02 96.901,33.02 94.869,35.052 94.869,37.719 94.234,38.354 91.821,38.354 91.186,37.719 91.186,35.306 88.9,33.02 87.782,33.02 ; 96.876,37.973 98.044,37.973 ; 96.901,36.83 98.019,36.83 ; 96.901,39.497 98.044,39.497 ; 97.028,37.211 98.12,37.211 ; 97.028,37.592 98.146,37.592 ; 97.028,38.354 98.095,38.354 ; 97.053,10.541 101.524,10.541 ; 97.053,41.783 98.044,41.783 ; 97.053,42.545 98.273,42.545 ; 97.053,43.307 106.883,43.307 ; 97.079,39.116 98.095,39.116 ; 97.079,108.458 101.016,108.458 ; 97.13,38.735 98.273,38.735 ; 97.257,5.969 99.365,5.969 ; 97.257,6.35 99.263,6.35 ; 97.257,6.731 99.162,6.731 ; 97.257,7.112 99.06,7.112 ; 97.257,7.493 98.958,7.493 ; 97.257,7.874 99.06,7.874 ; 97.257,8.255 99.162,8.255 ; 97.257,8.636 99.263,8.636 ; 97.257,9.017 99.365,9.017 ; 97.257,9.398 99.695,9.398 ; 97.257,9.779 100.076,9.779 ; 97.434,106.172 100.66,106.172 ; 97.561,108.077 100.533,108.077 ; 97.663,44.45 97.765,44.45 ; 97.765,106.553 100.33,106.553 ; 97.79,107.696 100.305,107.696 ; 97.866,106.934 100.228,106.934 ; 97.892,107.315 100.203,107.315 ; 97.942,5.588 99.644,5.588 ; 98.019,2.921 131.826,2.921 ; 98.019,3.302 131.826,3.302 ; 98.019,3.683 131.826,3.683 ; 98.019,4.064 131.826,4.064 ; 98.019,4.445 101.346,4.445 ; 98.019,4.826 100.406,4.826 ; 98.019,5.207 100.025,5.207 ; 98.095,42.164 97.155,42.164 ; 98.501,44.069 97.282,44.069 ; 98.577,44.069 101.575,44.069 ; 98.933,105.41 174.269,105.41 ; 99.009,42.926 96.774,42.926 ; 99.085,42.926 100.279,42.926 ; 99.289,34.544 101.829,34.544 ; 99.314,44.45 100.152,44.45 ; 99.314,55.118 99.949,55.118 ; 99.492,33.401 101.956,33.401 ; 99.492,44.831 99.771,44.831 ; 99.517,34.163 101.727,34.163 ; 99.593,33.782 101.778,33.782 ; 99.695,54.737 103.327,54.737 ; 99.746,53.975 101.041,53.975 ; 99.771,69.596 135.331,69.596 ; 99.797,54.356 103.734,54.356 ; 99.949,90.17 104.978,90.17 ; 99.974,60.452 127.61,60.452 ; 100.025,90.932 104.216,90.932 ; 100.051,90.551 104.597,90.551 ; 100.127,105.029 174.244,105.029 ; 100.228,55.118 102.946,55.118 ; 100.279,93.599 109.169,93.599 ; 100.355,42.926 101.549,42.926 ; 100.457,10.16 97.257,10.16 ; 100.508,104.648 173.863,104.648 ; 100.838,93.98 109.017,93.98 ; 100.889,55.499 102.565,55.499 ; 100.889,104.267 173.482,104.267 ; 101.041,55.88 102.184,55.88 ; 101.041,97.79 103.276,97.79 ; 101.117,53.975 131.775,53.975 ; 101.194,69.215 107.036,69.215 ; 101.219,94.361 109.017,94.361 ; 101.27,103.886 173.101,103.886 ; 101.346,98.171 103.454,98.171 ; 101.397,60.833 172.974,60.833 ; 101.422,97.409 103.276,97.409 ; 101.524,94.742 103.53,94.742 ; 101.575,97.028 103.276,97.028 ; 101.625,42.926 102.819,42.926 ; 101.625,95.123 103.276,95.123 ; 101.651,103.505 172.72,103.505 ; 101.676,96.647 103.276,96.647 ; 101.676,105.791 172.847,105.791 ; 101.727,95.504 103.276,95.504 ; 101.727,98.552 116.789,98.552 ; 101.778,96.266 103.276,96.266 ; 101.829,68.834 106.604,68.834 ; 101.829,95.885 103.276,95.885 ; 101.854,53.594 132.385,53.594 ; 101.854,103.124 172.517,103.124 ; 101.879,61.214 172.491,61.214 ; 101.879,98.933 117.17,98.933 ; 101.956,102.743 172.415,102.743 ; 101.981,99.314 117.577,99.314 ; 102.032,53.213 132.334,53.213 ; 102.057,102.362 172.314,102.362 ; 102.083,52.832 132.436,52.832 ; 102.083,99.695 126.187,99.695 ; 102.108,52.451 132.817,52.451 ; 102.159,101.981 172.212,101.981 ; 102.159,108.458 104.191,108.458 ; 102.184,100.076 172.187,100.076 ; 102.21,68.453 106.172,68.453 ; 102.26,61.595 104.521,61.595 ; 102.26,101.6 172.11,101.6 ; 102.286,100.457 172.085,100.457 ; 102.362,101.219 172.009,101.219 ; 102.387,52.07 169.596,52.07 ; 102.387,100.838 171.983,100.838 ; 102.514,106.172 143.281,106.172 ; 102.591,68.072 105.74,68.072 ; 102.641,16.637 108.941,16.637 ; 102.641,61.976 104.14,61.976 ; 102.641,108.077 137.998,108.077 ; 102.845,106.553 142.824,106.553 ; 102.87,44.069 103.454,44.069 ; 102.87,51.308 109.703,51.308 ; 102.87,107.696 138.379,107.696 ; 102.895,42.926 104.089,42.926 ; 102.921,10.541 126.568,10.541 ; 102.946,106.934 142.443,106.934 ; 102.972,67.691 105.283,67.691 ; 102.972,107.315 138.76,107.315 ; 103.022,17.018 108.56,17.018 ; 103.022,62.357 103.911,62.357 ; 103.099,4.445 126.39,4.445 ; 103.149,44.45 103.302,44.45 ; 103.149,45.212 103.378,45.212 ; 103.276,44.831 103.251,44.831 ; 103.327,62.738 103.81,62.738 ; 103.327,67.31 104.851,67.31 ; 103.403,17.399 108.28,17.399 ; 103.429,63.119 103.81,63.119 ; 103.429,66.929 104.673,66.929 ; v1@103.53,56.642 123.673,56.642 ; 103.53,63.5 103.81,63.5 ; 103.53,66.548 104.673,66.548 ; 103.632,63.881 103.81,63.881 ; 103.632,66.167 104.673,66.167 ; 103.708,33.884 104.724,33.884 ; 103.734,34.265 103.683,34.265 ; 103.734,64.262 103.81,64.262 ; 103.734,65.786 104.673,65.786 ; 103.784,17.78 105.893,17.78 ; 103.784,26.543 113.386,26.543 ; 103.835,64.643 103.911,64.643 ; 103.835,65.405 104.521,65.405 ; 103.911,56.261 177.8,56.261 ; 103.937,65.024 104.14,65.024 ; 103.988,10.16 108.356,10.16 ; 104.038,4.826 109.753,4.826 ; 104.115,43.688 97.155,43.688 ; 104.165,18.161 105.613,18.161 ; 104.165,42.926 117.831,42.926 ; 104.292,55.88 131.293,55.88 ; 104.369,9.779 107.975,9.779 ; 104.394,43.688 106.147,43.688 ; 104.419,5.207 109.372,5.207 ; 104.546,18.542 105.512,18.542 ; 104.75,9.398 107.798,9.398 ; 104.8,5.588 109.169,5.588 ; 104.902,26.162 113.106,26.162 ; 104.902,42.545 118.161,42.545 ; 104.927,18.923 105.613,18.923 ; 104.927,89.408 105.74,89.408 ; 105.029,37.592 118.593,37.592 ; 105.029,39.878 119.228,39.878 ; 105.029,41.402 118.593,41.402 ; 105.054,36.449 106.401,36.449 ; 105.054,37.211 119.05,37.211 ; 105.054,40.259 120.752,40.259 ; 105.054,41.021 119.482,41.021 ; 105.054,44.069 105.334,44.069 ; 105.08,5.969 109.068,5.969 ; 105.08,9.017 107.696,9.017 ; 105.08,38.354 118.212,38.354 ; 105.08,39.116 118.593,39.116 ; 105.08,42.164 118.11,42.164 ; 105.131,37.973 118.313,37.973 ; 105.131,39.497 118.948,39.497 ; 105.131,41.783 118.212,41.783 ; 105.181,6.35 109.093,6.35 ; 105.181,8.636 107.721,8.636 ; 105.258,33.503 103.607,33.503 ; 105.283,6.731 109.195,6.731 ; 105.283,8.255 107.823,8.255 ; 105.283,25.781 113.005,25.781 ; 105.283,93.218 109.55,93.218 ; 105.308,19.304 105.893,19.304 ; 105.359,89.789 99.568,89.789 ; 105.385,7.112 109.449,7.112 ; 105.385,7.874 108.102,7.874 ; 105.385,25.4 113.106,25.4 ; 105.486,7.493 108.636,7.493 ; 105.613,44.069 105.969,44.069 ; 105.664,89.027 106.121,89.027 ; 105.689,19.685 106.782,19.685 ; 105.689,92.837 109.931,92.837 ; 105.791,87.884 107.925,87.884 ; 105.791,94.742 106.629,94.742 ; 105.842,36.068 106.223,36.068 ; 105.842,88.646 106.502,88.646 ; 105.867,98.171 106.451,98.171 ; 105.893,88.265 143.815,88.265 ; 106.045,95.123 106.147,95.123 ; 106.07,92.456 133.325,92.456 ; 106.096,35.687 106.172,35.687 ; 106.274,61.595 107.061,61.595 ; 106.451,92.075 177.8,92.075 ; 106.604,108.458 107.467,108.458 ; 106.655,61.976 106.68,61.976 ; 106.832,91.694 177.8,91.694 ; 106.959,43.307 117.729,43.307 ; 107.036,30.734 91.338,30.734 ; 107.086,27.686 113.767,27.686 ; 107.137,36.83 105.156,36.83 ; 107.188,14.732 115.9,14.732 ; 107.213,36.83 119.228,36.83 ; 107.213,91.313 177.8,91.313 ; 107.594,90.932 177.8,90.932 ; 107.645,87.503 105.41,87.503 ; 107.696,43.688 117.78,43.688 ; 107.772,94.742 109.017,94.742 ; 107.874,44.069 117.958,44.069 ; 107.95,36.449 119.964,36.449 ; 107.95,98.171 108.991,98.171 ; 107.975,90.551 177.8,90.551 ; 108.128,36.068 122.961,36.068 ; 108.179,35.687 122.479,35.687 ; 108.255,95.123 108.687,95.123 ; 108.331,97.79 108.61,97.79 ; 108.407,108.458 110.007,108.458 ; 108.814,61.595 109.601,61.595 ; 108.839,28.067 114.148,28.067 ; 109.017,108.839 109.398,108.839 ; 109.195,61.976 109.22,61.976 ; 109.22,86.36 120.371,86.36 ; 109.22,87.884 120.371,87.884 ; 109.245,28.448 117.856,28.448 ; 109.499,86.741 120.091,86.741 ; 109.499,87.503 120.091,87.503 ; 109.626,28.829 117.958,28.829 ; 109.703,15.875 44.831,15.875 ; 109.779,7.493 109.906,7.493 ; 109.88,74.168 110.338,74.168 ; 110.007,29.21 118.339,29.21 ; 110.058,10.16 111.125,10.16 ; 110.312,7.874 110.871,7.874 ; 110.439,9.779 110.744,9.779 ; 110.49,98.171 111.531,98.171 ; 110.871,97.79 111.15,97.79 ; 110.947,108.458 112.547,108.458 ; 110.998,51.308 129.134,51.308 ; 111.15,73.787 111.938,73.787 ; 111.252,7.493 111.404,7.493 ; 111.354,61.595 112.141,61.595 ; 111.404,4.826 112.522,4.826 ; 111.557,108.839 111.938,108.839 ; 111.709,7.112 112.217,7.112 ; 111.735,61.976 111.76,61.976 ; 111.785,5.207 112.141,5.207 ; 112.547,7.493 112.674,7.493 ; v1@112.751,19.406 138.938,19.406 ; 112.801,20.93 159.69,20.93 ; 112.827,10.16 113.894,10.16 ; 113.03,98.171 114.071,98.171 ; v1@113.055,19.787 139.04,19.787 ; 113.055,20.549 159.69,20.549 ; 113.081,7.874 113.64,7.874 ; 113.157,20.168 139.395,20.168 ; 113.208,9.779 113.513,9.779 ; 113.411,97.79 113.69,97.79 ; 113.487,108.458 115.087,108.458 ; 113.64,21.311 159.69,21.311 ; 113.843,21.692 159.69,21.692 ; 113.894,22.073 159.69,22.073 ; 113.894,61.595 114.681,61.595 ; 114.021,7.493 114.173,7.493 ; 114.097,108.839 114.478,108.839 ; 114.173,4.826 115.291,4.826 ; 114.275,61.976 114.3,61.976 ; 114.478,7.112 114.986,7.112 ; 114.554,5.207 114.91,5.207 ; 115.189,28.067 115.926,28.067 ; 115.316,7.493 115.443,7.493 ; 115.57,79.502 177.8,79.502 ; 115.57,98.171 116.611,98.171 ; 115.595,10.16 116.662,10.16 ; 115.824,12.065 127.737,12.065 ; 115.849,7.874 116.408,7.874 ; 115.849,79.121 152.222,79.121 ; 115.951,97.79 116.23,97.79 ; 115.976,9.779 116.281,9.779 ; 116.027,108.458 117.627,108.458 ; 116.434,61.595 117.221,61.595 ; v1(116.459,27.178) v1(121.539,27.178) ; 116.637,108.839 117.018,108.839 ; 116.789,7.493 116.942,7.493 ; 116.815,61.976 116.84,61.976 ; 116.942,4.826 118.059,4.826 ; 116.967,28.067 117.907,28.067 ; 117.094,14.732 154.61,14.732 ; 117.246,7.112 117.754,7.112 ; 117.323,5.207 117.678,5.207 ; 117.348,27.686 118.085,27.686 ; 117.399,14.351 154.61,14.351 ; 117.399,26.924 120.574,26.924 ; 117.424,13.589 130.404,13.589 ; 117.45,27.305 118.821,27.305 ; 117.5,13.97 154.61,13.97 ; 118.085,7.493 118.212,7.493 ; 118.313,38.735 104.902,38.735 ; 118.364,10.16 118.923,10.16